# Altium PCB bdcmc25.PcbDoc (part 2 of 4)
Units mil, origin at the board's own origin, x right, y up, seen from the top; angles counter-clockwise.
Board outline 7750 x 2750 mil, 4 copper layers (Layer 1, Layer 2 (GND), Layer 3 (GND), Layer 4), stack 23.756 mil thick; 330 components, 156 nets, 997 pads, 1122 vias.
Unrouted connection lines stored in the file: 39.
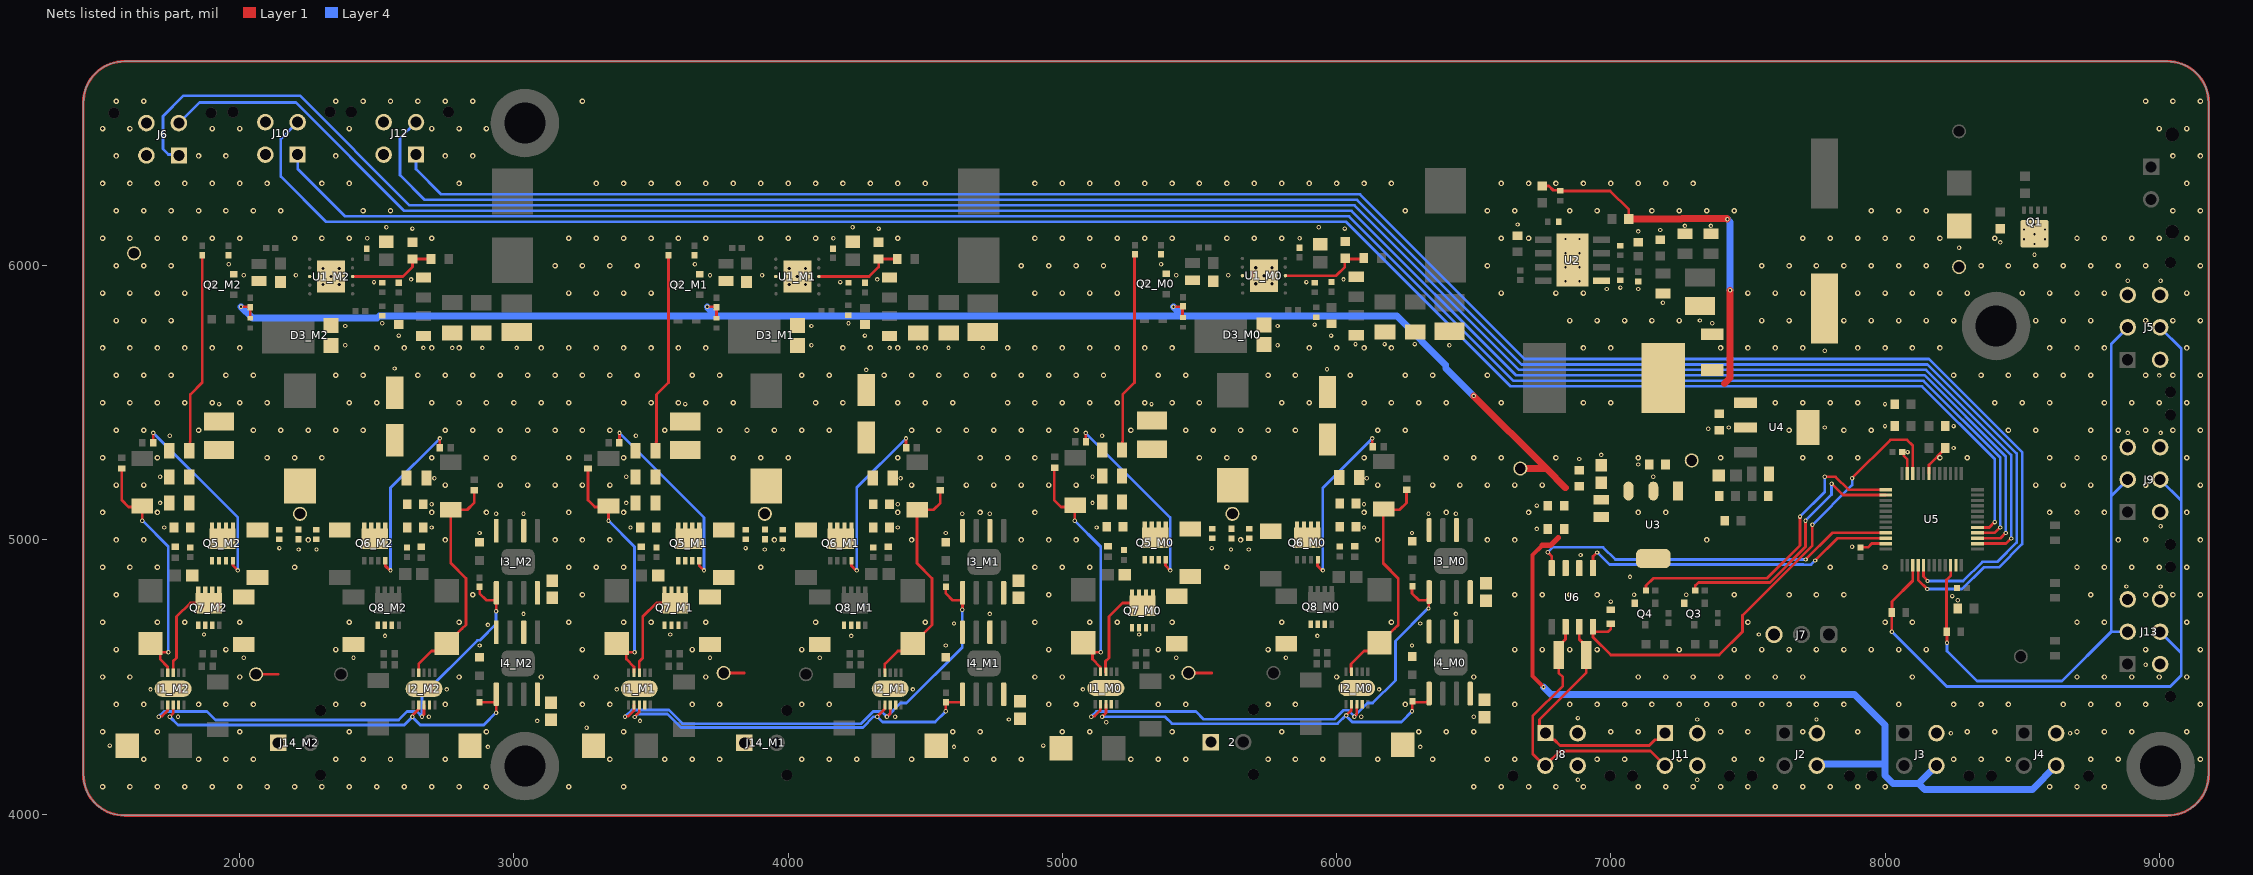
[diagram p4: the nets of this part, all layers, seen from the top]

## Part data
2 J14_M1 J14_M2: library part CONN-2POS-0001, "Connector Header Through Hole 2 position", Mfr_Name="Molex Connector Corporation", RefDes=RefDes, Type=Type
3V3 5V 8V GND GND TP3_M0 TP3_M1 TP3_M2 TP8_M0 TP8_M1 TP8_M2 TP9_M0 TP9_M1 TP9_M2 VBAT: "Oranange PC Test Point, Miniature Phoisphor Bronze Silver Plating Through Hole Mounting Type"
C1: library part CAP-100U-0001, "100uF 100V dc ALUM Electrolytic Capacitor J16,TK(A)Series 2000h 16(Dia.)x16.5mm", Capacitance=100uF, Package="RADIAL-2 Panasonic", Voltage=100V, Check_prices=https://www.snapeda.com/parts/EEETK2A101AM/Panasonic/view-part/?ref=eda, MF=Panasonic, MP=EEETK2A101AM, SnapEDA_Link=https://www.snapeda.com/parts/EEETK2A101AM/Panasonic/view-part/?ref=snap
C2 C9_M0 C9_M1 C9_M2 C16_M0 C16_M1 C16_M2: library part CAP-10U-0002, "CAP CER 10UF 50V X7R 1210", Capacitance=10uF, Case Code (Imperial)=1210, Case Code (Metric)=3225, Dielectric=X7R, Max Operating Temperature=125°C, Min Operating Temperature=-55°C, Package Quantity=1, Tolerance=10%, Voltage=50V, Case/Package=1210, Depth=2.5mm, Height=2.5mm, Lead Free="Lead Free", Length=3.2mm, Material=Ceramic, Mount="Surface Mount", Packaging="Tape and Reel", Radiation Hardening=No, Thickness=0.106inch, Voltage Rating=50V, Voltage Rating (DC)=50V, Width=0.098inch
C3 C10_M0 C10_M1 C10_M2 C17_M0 C17_M1 C17_M2 C56_M0 C56_M1 C56_M2 C57_M0 C57_M1 C57_M2: library part CAP-1U-0001, "CAP CER 1UF 50V X7R 0805", Capacitance="1 uF", Manufacturer=Yageo, Package=CC0805-0.85, Temperature="-30°C to +85°C", Temperature Characteristic=X7R, Temperature Range High=+85°C, Temperature Range Low=-30°C, Tolerance=0.1, Voltage Rating="50 V", Automotive=No, Category=Cap, ComponentLink2Description=Datasheet, ComponentLink2URL=http://www.yageo.com/documents/recent/UPY-GPHC_Y5V_6.3V-to-50V_8.pdf, Device Class L1="Passive Components", Device Class L2=Capacitors, Device Class L3="Ceramic Capacitors", Digikey Description="CAP CER 1UF 50V X7R 0805", Footprint Url=http://www.yageo.com/exep/pages/download/literatures/UPY-C_GEN_24.pdf, Height=0.95mm, Ipc Land Pattern Name=CAPC200125X85, Lead Free=Yes, Manufacturer Part Number=CC0805KKX7R9BB105, Material=Ceramic, Mouser Description="Multilayer Ceramic Capacitors MLCC - SMD/SMT 1.0uF 50V X7R 10%", Octopart=https://octopart.com/cc0805kkx7r9bb105-yageo-21707071, RoHS=TRUE
C4 C11_M0 C11_M1 C11_M2 C18_M0 C18_M1 C18_M2: library part CAP-0.1U-0002, "CAP CER 0.1UF 50V X7R 0805", Capacitance="100 nF", Manufacturer=Yageo, Package=CC0805-0.85, Temperature="-30°C to +85°C", Temperature Characteristic=X7R, Temperature Range High=+85°C, Temperature Range Low=-30°C, Tolerance=0.1, Voltage Rating="50 V", Automotive=No, Category=Cap, ComponentLink2Description=Datasheet, ComponentLink2URL=http://www.yageo.com/documents/recent/UPY-GPHC_Y5V_6.3V-to-50V_8.pdf, Device Class L1="Passive Components", Device Class L2=Capacitors, Device Class L3="Ceramic Capacitors", Digikey Description="CAP CER 0.1UF 50V X7R 0805", Footprint Url=http://www.yageo.com/exep/pages/download/literatures/UPY-C_GEN_24.pdf, Height=0.95mm, Ipc Land Pattern Name=CAPC200125X85, Lead Free=Yes, Manufacturer Part Number=CC0805KRX7R9BB104, Material=Ceramic, Mouser Description="Multilayer Ceramic Capacitors MLCC - SMD/SMT 100nF 50V X7R 10%", Octopart=https://octopart.com/cc0805krx7r9bb104-yageo-192993, RoHS=TRUE
C5 C12_M0 C12_M1 C12_M2 C19_M0 C19_M1 C19_M2 C52 C54 C58_M0 C58_M1 C58_M2 C59_M0 C59_M1 C59_M2: library part CAP-10N-0002, "CAP CER 10000PF 50V X7R 0603", Capacitance="10 nF", Manufacturer=YAGEO, Package=CC0603-DA, Temperature="-55°C to +125°C", Temperature Characteristic=X7R, Temperature Coefficient=15%, Temperature Range High=+125°C, Temperature Range Low=-55°C, Tolerance=0.1, Voltage="50 V", Automotive=No, Category=Cap, ComponentLink2Description=Datasheet, ComponentLink2URL=http://www.yageo.com/documents/recent/UPY-GPHC_X7R_6.3V-to-50V_18.pdf, Device Class L1="Passive Components", Device Class L2=Capacitors, Device Class L3="Ceramic Capacitors", Digikey Description="CAP CER 10000PF 50V X7R 0603", Footprint Url=http://www.yageo.com/exep/pages/download/literatures/UPY-C_GEN_24.pdf, Height=0.9mm, Lead Free=Yes, Manufacturer Part Number=CC0603KPX7R9BB103, Material=Ceramic, Mouser Description="0603 10 nF 50V ±10 % Tolerance X7R SMT Multilayer Ceramic Capacitor", Octopart=https://octopart.com/cc0603kpx7r9bb103-yageo-12885112, RoHS=TRUE, Voltage Rating="50 V"
C6 C13_M0 C13_M1 C13_M2 C20_M0 C20_M1 C20_M2 C62_M0 C62_M1 C62_M2 C63_M0 C63_M1 C63_M2: library part CAP-1N-0001, "CAP CER 1000PF 50V X7R 0402", Capacitance="1.0 nF", Manufacturer=YAGEO, Package=CC0402, Temperature="-55°C to +125°C", Temperature Characteristic=X7R, Temperature Coefficient=30ppm/°C, Temperature Range High=+125°C, Temperature Range Low=-55°C, Tolerance=0.1, Voltage Rating="50 V", Automotive=No, Automotive Grade=NA, Category=Cap, ComponentLink2Description=Datasheet, ComponentLink2URL=http://www.yageo.com/documents/recent/UPY-GP_NP0_16V-to-50V_16.pdf, Device Class L1="Passive Components", Device Class L2=Capacitors, Device Class L3="Ceramic Capacitors", Digikey Description="CAP CER 1000PF 50V X7R 0402", Footprint Url=http://www.yageo.com/exep/pages/download/literatures/UPY-C_GEN_24.pdf, Height=0.55mm, Ipc Land Pattern Name=CAPC10050X50, Lead Free=Yes, Manufacturer Part Number=CC0402KRX7R9BB102, Material=Ceramic, Mouser Description="0402 1000 pF 50 V ±10 % Tolerance X7R SMT Multilayer Ceramic Capacitor", Octopart=https://octopart.com/cc0402krx7r9bb102-yageo-192889, RoHS=TRUE
C7 C14_M0 C14_M1 C14_M2 C21_M0 C21_M1 C21_M2: library part CAP-100P-0001, "100 pF ±5% 50V Ceramic Capacitor C0G, NP0 0402 (1005 Metric)", Capacitance="100 pF", Package=None, Voltage=50V, Availability=Unavailable, MP=CC0402JRNPO9BN101, Price=None
C8 C15_M0 C15_M1 C15_M2 C22_M0 C22_M1 C22_M2: library part CAP-10P-0001, "Chip Capacitor, 10 pF, +/- 5%, 50 V, -55 to 125 degC, 0402 (1005 Metric), RoHS, Tape and Reel", Capacitance="10 pF", Case Code (Imperial)=0402, Case Code (Metric)=1005, Dielectric=C0G, Dielectric Material=Ceramic, Insulation Resistance=100GR, Manufacturer=Yageo, Max Operating Temperature=125degC, Min Operating Temperature=-55degC, Package Description="2-Pin Surface Mount Device, Body 1 x 0.5 mm", Package Quantity=1, Temperature Coefficient=30ppm/degC, Tolerance=5%, Voltage=50V, Case/Package=0402, Composition=Ceramic, Datasheet URL=http://www.yageo.com/documents/recent/UPY-GP_NP0_16V-to-50V_14.pdf, Datasheet Version="Rev. 14, 07/2016", Depth=0.5mm, Height=0.5mm, Lead Free=LeadFree, Length=1mm, Manufacturer URL=http://www.yageo.com/, Mount=SurfaceMount, Number of Pins=2, Package Reference=0402, Packaging=TapeandReel, Radiation Hardening=No, REACH SVHC=NoSVHC, RoHSCompliant=True, Termination=SMD/SMT, Thickness=0.022inch, Voltage Rating=50V, Voltage Rating (DC)=50V, Width=0.02inch
C23_M0 C23_M1 C23_M2 C30 C48 C49 C50: library part CAP-0.1U-0001, "CAP CER 0.1UF 16V X7R 0402", Capacitance="100 nF", Manufacturer=YAGEO, Package=CC0402, Temperature="-55°C to +125°C", Temperature Characteristic=X7R, Temperature Coefficient=30ppm/°C, Temperature Range High=+125°C, Temperature Range Low=-55°C, Tolerance=0.1, Voltage Rating="16 V", Automotive=No, Automotive Grade=NA, Category=Cap, ComponentLink2Description=Datasheet, ComponentLink2URL=http://www.yageo.com/documents/recent/UPY-GP_NP0_16V-to-50V_16.pdf, Device Class L1="Passive Components", Device Class L2=Capacitors, Device Class L3="Ceramic Capacitors", Digikey Description="CAP CER 0.1UF 16V X7R 0402", Footprint Url=http://www.yageo.com/exep/pages/download/literatures/UPY-C_GEN_24.pdf, Height=0.55mm, Ipc Land Pattern Name=CAPC10050X50, Lead Free=Yes, Manufacturer Part Number=CC0402KRX7R7BB104, Material=Ceramic, Mouser Description="0402 0.1 uF 16 V ±10 % Tolerance X7R SMT Multilayer Ceramic Capacitor", Octopart=https://octopart.com/cc0402krx7r7bb104-yageo-42244624, RoHS=TRUE
C24_M0 C24_M1 C24_M2 C25_M0 C25_M1 C25_M2: library part CAP-2.2U-0001, "CAP CER 2.2UF 100V X7R 1206", Capacitance=2.2uF, Case/Package=1206, Max Operating Temperature=125°C, Min Operating Temperature=-55°C, Tolerance=10%, Voltage=100V, Length=0.126inch, Mount="Surface Mount", Packaging="Tape and Reel", Thickness=0.057inch, Voltage Rating=100V, Width=0.063inch
C26_M0 C26_M1 C26_M2: library part CAP-47U-0001, "CAP ALUM POLY 47UF 20% 16V SMD", Capacitance=47uF, Case/Package=Radial, ESR (Equivalent Series Resistance)=25mR, Max Operating Temperature=105°C, Min Operating Temperature=-55°C, Package Quantity=2500, Ripple Current=3.2A, Tolerance=20%, Voltage=16V, Height - Seated (Max)=0.177inch, Life (Hours)=5000Hour, Mount="Surface Mount", Packaging="Cut Tape", Polarity=Polar, REACH SVHC="No SVHC", RoHS Compliant=Yes, Series="OS-CON™, SVPG", Voltage Rating=16V, Voltage Rating (DC)=16V
C27_M0 C27_M1 C27_M2: library part CAP-2.7N-0001, "Chip Multilayer Ceramic Capacitors for General Purpose, 0805, 2700pF, C0G, 30ppm/°C, 5%, 50V", Capacitance=2.7nF, Case Code (Imperial)=0805, Case Code (Metric)=2012, Dielectric=C0G, Max Operating Temperature=125°C, Min Operating Temperature=-55°C, Package Quantity=1, Temperature Coefficient=30ppm/°C, Tolerance=5%, Voltage=50V, Case/Package=0805, Depth=1.25mm, Height=0.6mm, Lead Free="Lead Free", Length=2mm, Mount="Surface Mount", Number of Pins=2, Packaging="Tape and Reel", Radiation Hardening=No, REACH SVHC="No SVHC", RoHS Compliant=Yes, Termination=SMD/SMT, Thickness=0.028inch, Voltage Rating=50V, Voltage Rating (DC)=50V, Width=0.049inch
C28_M0 C28_M1 C28_M2: library part CAP-6.8P-0001, "6.8pF ±0.25pF 100V Ceramic Capacitor C0G, NP0 0603 _1608 Metric", Capacitance=6.8pF, Package="0603 Yageo", Voltage=100V, Digi-Key_Part_Number=311-3850-1-ND, Digi-Key_Purchase_URL=https://www.digikey.com.tr/product-detail/en/yageo/CC0603CRNPO0BN6R8/311-3850-1-ND/8024939?utm_source=snapeda&utm_medium=aggregator&utm_campaign=symbol, MF=Yageo, MP=CC0603CRNPO0BN6R8, SnapEDA_Link=https://www.snapeda.com/parts/CC0603CRNPO0BN6R8/Yageo/view-part/1934420/?ref=snap
C29_M0 C29_M1 C29_M2: library part CAP-470P-0001, "CAP CER 470PF 50V C0G/NPO 0805", Capacitance=470pF, Mfr_Name=Yageo, Voltage=50V
C31 C39 C45 C47: library part CAP-10U-0001, "CAP CER 10UF 10V X5R 0603", Capacitance=10uF, Case Code (Imperial)=0603, Case Code (Metric)=1608, Dielectric=X5R, Max Operating Temperature=85°C, Min Operating Temperature=-55°C, Package Quantity=4000, Rated Voltage=10V, Resistor Type=Ceramic, Tolerance=10%, Case/Package=0603, Depth=0.8mm, Halogen Free="Halogen Free", Lead Free="Lead Free", Length=0.063inch, Mount="Surface Mount", Packaging="Tape and Reel", RoHS Compliant=Yes, Termination=SMD/SMT, Thickness=0.035inch, Voltage Rating=10V, Voltage Rating (DC)=10V, Weight=7.1E-05oz, Width=0.031inch
C32 C40 C41 C53 C55: library part CAP-1U-0002, "1 µF ±10% 16V Ceramic Capacitor X7R 0603 (1608 Metric)", Capacitance="1 µF", Voltage=16V
C33 C42: library part CAP-470P-0001, "CAP CER 470PF 50V C0G/NPO 0805", Capacitance="470 pF", Mfr_Name=Yageo, Voltage=50V
C34 C43 C60_M0 C60_M1 C60_M2 C61_M0 C61_M1 C61_M2 C64_M0 C64_M1 C64_M2 C65_M0 C65_M1 C65_M2: library part CAP-100N-0001, "0.1 µF ±10% 100V Ceramic Capacitor X7R 0603 (1608 Metric)", Capacitance="100 nF", Voltage="100 V"
C35: library part CAP-5.1P-0001, "5.1pF Â±0.25pF 50V Ceramic Capacitor C0G, NP0 0402 (1005 Metric)", Capacitance="5.1 pF", Package="0402 Yageo", Voltage Rating=50V, Availability=Good, Check_prices=https://www.snapeda.com/parts/CC0402CRNPO9BN5R1/Yageo/view-part/1841461/?ref=eda, MF=Yageo, MP=CC0402CRNPO9BN5R1, Price=None, Purchase-URL=https://pricing.snapeda.com/search/part/CC0402CRNPO9BN5R1/?ref=eda, SnapEDA_Link=https://www.snapeda.com/parts/CC0402CRNPO9BN5R1/Yageo/view-part/1841461/?ref=snap
C36: library part CAP-4.7U-0002, "CAP CER 4.7UF 50V X5R 0805", Capacitance="4.7 uF", Manufacturer=Yageo, Package=CC0805-0.85, Temperature="-30°C to +85°C", Temperature Characteristic=X5R, Temperature Range High=+85°C, Temperature Range Low=-30°C, Tolerance=0.1, Voltage Rating="50 V", Automotive=No, Category=Cap, ComponentLink2Description=Datasheet, ComponentLink2URL=http://www.yageo.com/documents/recent/UPY-GPHC_Y5V_6.3V-to-50V_8.pdf, Device Class L1="Passive Components", Device Class L2=Capacitors, Device Class L3="Ceramic Capacitors", Digikey Description="CAP CER 4.7UF 50V X5R 0805", Footprint Url=http://www.yageo.com/exep/pages/download/literatures/UPY-C_GEN_24.pdf, Height=0.95mm, Ipc Land Pattern Name=CAPC200125X85, Lead Free=Yes, Manufacturer Part Number=CC0805KKX5R9BB475, Material=Ceramic, Octopart=https://octopart.com/cc0805kkx5r9bb475-yageo-81932641, RoHS=TRUE
C37: library part CAP-0.22U-0001, "0.22 µF ±5% 50V Ceramic Capacitor X7R 0603 (1608 Metric)", Capacitance=0.22uF, Mfr_Name=Yageo, Voltage=50V
C38: library part CAP-22U-0001, "CAP CER 22UF 25V X5R 1210", Capacitance=22uF, Manufacturer="Murata Electronics North America", Operating Temperature="-55°C ~ 85°C", Package=GRM32, Package / Case="1210 (3225 Metric)", Standard Package=1,000, Temperature="-55°C to +85°C", Temperature Characteristic=X5R, Temperature Range High=+85°C, Temperature Range Low=-55°C, Tolerance=10%, Voltage - Rated=25V, Applications="General Purpose", Automotive=No, Category=Cap, ComponentLink2Description=Datasheet, ComponentLink2URL=https://search.murata.co.jp/Ceramy/image/img/A01X/G101/ENG/GRM32ER61E226KE15-01A.pdf, Device Class L1="Passive Components", Device Class L2=Capacitors, Device Class L3="Ceramic Capacitors", Digikey Description="CAP CER 22UF 25V X5R 1210", Height=2.7mm, Lead Free=Yes, Manufacturer Part Number=GRM32ER61E226KE15L, Material=Ceramic, Mounting Type="Surface Mount, MLCC", Mouser Description="Multilayer Ceramic Capacitors MLCC - SMD/SMT 1210 22uF 25volts X5R 10%", Octopart=https://octopart.com/grm32er61e226ke15l-murata-197441, Other Names=490-3889-2, Packaging="Cut Tape (CT)", Possible Substitute=GRM32ER61E226KE15K, RoHS=TRUE, Size / Dimension="0.126\" L x 0.098\" W (3.20mm x 2.50mm)", Temperature Coefficient=X5R, Thickness (Max)="0.106\" (2.70mm)", Voltage Rating=25V
C44 C46: library part CAP-0.33U-0001, "CAP CER 0.33UF 25V X7R 0603", Capacitance="330 nF", Manufacturer=YAGEO, Package=CC0603-DA, Rated Voltage=25V, Temperature="-55°C to +125°C", Temperature Characteristic=X7R, Temperature Coefficient=15%, Temperature Range High=+125°C, Temperature Range Low=-55°C, Tolerance=0.1, Voltage="25 V", Automotive=No, Category=Cap, ComponentLink2Description=Datasheet, ComponentLink2URL=http://www.yageo.com/documents/recent/UPY-GPHC_X7R_6.3V-to-50V_18.pdf, Device Class L1="Passive Components", Device Class L2=Capacitors, Device Class L3="Ceramic Capacitors", Digikey Description="CAP CER 0.33UF 25V X7R 0603", Footprint Url=http://www.yageo.com/exep/pages/download/literatures/UPY-C_GEN_24.pdf, Height=0.9mm, Lead Free=Yes, Manufacturer Part Number=CC0603KRX7R8BB334, Material=Ceramic, Mouser Description="0603 0.33 uF 25 V ±10 % Tolerance X7R SMT Multilayer Ceramic Capacitor", Octopart=https://octopart.com/cc0603krx7r8bb334-yageo-47255252, RoHS=TRUE, Voltage Rating="25 V"
C51: library part CAP-4.7U-0001, "25V 4.7uF X5R ±10% 0603 Multilayer Ceramic Capacitors MLCC - SMD/SMT ROHS", Capacitance="4.7 uF", JLC part number=C326580, Tolerance=10%, Voltage=25V, assembled=yes
D1: library part DIO-TVS-0001, "TVS DIODE 40VWM 64.5VC DO214AA", Clamping Voltage=64.5V, Current=9.3A, Mfr_Name="Bourns Electronics"
D2_M0 D2_M1 D2_M2 D4 D5 D18_M0 D18_M1 D18_M2 D19_M0 D19_M1 D19_M2: library part LED-0001, "LED YELLOW CLEAR 0603 SMD", Current Rating=30mA, Vf=2V
D3_M0 D3_M1 D3_M2: library part DIO-SHOTTKY-0001, "Schottky Barrier Rectifier, 60 V, 7 A, -65 to 150 degC, 3-Pin SMD, RoHS, Tape and Reel", Average Rectified Current=7A, Case\/Package=SMD/SMT, Forward Voltage=620mV, Manufacturer="Diodes Inc", Max Forward Surge Current (Ifsm)=275A, Max Operating Temperature=150degC, Max Repetitive Reverse Voltage (Vrrm)=60V, Min Operating Temperature=-65degC, Package Description="3-Pin Surface Mount Device, Body 3.975 x 5.375 mm, Pitch 1.84 mm", Package Quantity=5000, Package Reference=POWERDI5-3, Peak Reverse Current=200uA, Contact Plating=Matte, Current Rating=7A, Datasheet URL=https://www.diodes.com/assets/Datasheets/ds30477.pdf, Datasheet Version="Rev. 13-2, 10/2012", Element Configuration=CommonAnode, Forward Current=7A, Height=1.15mm, Lead Free=LeadFree, Length=4.05mm, Manufacturer URL=http://www.diodes.com/, Mount=SurfaceMount, Mounting Technology=SurfaceMount, Number of Pins=5, Output Current=7A, Packaging=TapeandReel, Peak Non-Repetitive Surge Current=275A, Polarity=Standard, Radiation Hardening=No, REACH SVHC=NoSVHC, Reverse Voltage (DC)=60V, RoHSCompliant=true, Voltage Rating (DC)=60V, Weight=0.003386oz, Width=5.45mm
D6_M0 D6_M1 D6_M2 D7_M0 D7_M1 D7_M2 D8_M0 D8_M1 D8_M2 D9_M0 D9_M1 D9_M2 D11_M0 D11_M1 D11_M2 D12_M0 D12_M1 D12_M2 D15_M0 D15_M1 D15_M2 D16_M0 D16_M1 D16_M2: library part DIO-0.53V-0001, "Diode Schottky 60 V 3A Surface Mount SOD-128/CFP5", Current Rating=3A, Manufacturer="Nexperia USA Inc.", Package=SOD-128/CFP5, Vf (Voltage Forward)="530 mV", assembled=no, Manufacturer Part Number=PMEG6030EP,115
D10_M0 D10_M1 D10_M2 D13_M0 D13_M1 D13_M2 D14_M0 D14_M1 D14_M2 D17_M0 D17_M1 D17_M2: library part DIO-19.9V-0001, "19.9V Clamp 30.2A Ipp Tvs Diode Surface Mount DO-214AA (SMBJ)", Breakdown Voltage=13.3, Current Rating=30.2A, Manufacturer="Littlefuse Inc.", Package="DO-214AA (SMBJ)", Standoff Voltage=12V, assembled=No, Manufacturer Part Number=SMBJ12CA
F1_M0 F1_M1 F1_M2: library part FUSE-0001, "FUSE BLOK CARTRIDGE 125V 10A SMD", Fuse Current=8A, Manufacturer="Littelfuse Inc", Package=0155, Voltage Rating Ac=125V, Automotive=No, Category=Fuse, ComponentLink2Description=Datasheet, ComponentLink2URL=https://www.littelfuse.com/~/media/electronics/datasheets/fuses/littelfuse_fuse_154_154t_154l_154tl_datasheet.pdf.pdf, Conn Orientation=Horizontal, Device Class L1="Circuit Protection", Device Class L2="Fuse Holders", Device Class L3=unset, Digikey Description="FUSE BLOK CARTRIDGE 125V 10A SMD", Height=3.81mm, Lead Free=Yes, Manufacturer Part Number=01550900M, Mouser Description="Fuse Holder ACS NANO HLDR", Number Of Fuses=1, Octopart=https://octopart.com/01550900m-littelfuse-9291575, RoHS=TRUE
F2 F3 F4: library part FUSE-0002, "1 A AC 32 V DC Fuse Board Mount (Cartridge Style Excluded) Surface Mount 0603 (1608 Metric)", Fuse Current=1A, Mfr_Name=Vishay, Voltage Rating DC=32V
I1_M0 I1_M1 I1_M2 I2_M0 I2_M1 I2_M2: library part IC-GTDR-0001, "Half-Bridge Gate Driver IC Non-Inverting 10-VSON (3x3)", Package=10-VSON, VCC Max=16
I3_M0 I3_M1 I3_M2 I4_M0 I4_M1 I4_M2: library part IC-MUX-0001, "Multiplexer 1 x 2:1 8-VSSOP"
J1: "Connector Header Through Hole 2 position 0.118\" (3.00mm)", Mfr_Name="Molex Connector Corporation", RefDes=RefDes, Type=Type
J2 J3 J4 J6 J8 J10 J11 J12: library part CONN-4POS-0002, Package=43045-0412, DeviceName=43045-0412, DeviceSetName=HEADER_POS4_?, GateName_1=G$1, LibraryName=con-molex-micro-fit-3_0_2, SymbolName_1=HEADER_POS4
J5 J9 J13: library part CONN-6POS-0001, Package=43045-0612, DeviceName=43045-0612, DeviceSetName=HEADER_POS6_?, GateName_1=G$1, LibraryName=con-molex-micro-fit-3_0_2, SymbolName_1=HEADER_POS6
J7: library part CONN-3POS-0001, "Connector Header Through Hole 3 position 0.100\" (2.54mm)", Color=Black, Contact Resistance=20mΩ, Current Rating=3A, Max Operating Temperature=105°C, Min Operating Temperature=-40°C, Operating Supply Voltage=250V, Connector Type="Male Pin", Contact Material=Copper, Contact Mating Length=5.9944mm, Contact Plating=Gold, Gender=Male, Height=8.94mm, Lead Free="Lead Free", Lead Pitch=2.54mm, Mount="Through Hole", NexarPartId=32855521, Number of Contacts=3, Number of Pins=3, Number of Positions=3, Number of Rows=1, Orientation=Vertical, Packaging=Bulk, Pitch=2.54mm, REACH SVHC=Unknown, RoHS=Compliant, Termination=Solder, Voltage Rating=250V
L1_M0 L1_M1 L1_M2: library part IND-10U-0001, "FIXED IND 10UH 6.5A 30 MOHM SMD", Current Rating=6.5A, Inductance=10uH
L2: library part IND-4.7U-0001, "FIXED IND 220UH 520MA 960MOHM SM", Current Rating=2.75A, Inductance=4.7uH
Q1: library part NMOS-60A-0001, "MOSFET N-CH 60V 12A/60A 8VSON", Continuous Drain Current=12A, Drain Current=60A, Drain To Source Breakdown Voltage=60V, Drain To Source Resistance=8.1mΩ, Gate To Source Voltage=20V, Input Capacitace At Vds="885pF @ 30V", Manufacturer="Texas Instruments", Max Forward Diode Voltage=1V, Max Junction Temp=+150°C, Package=DNH0008A, Power Dissipation=2.8W, Pulse Drain Current=156A, Temperature="-55°C to +150°C", Temperature Range Low=-55°C, Typ Forward Diode Voltage=0.8V, Automotive=No, Category=Trans, ComponentLink2Description=Datasheet, ComponentLink2URL=http://www.ti.com/lit/ds/symlink/csd18543q3a.pdf, Depletion Mode=False, Device Class L1="Discrete Semiconductors", Device Class L2=Transistors, Device Class L3=MOSFETs, Digikey Description="60V N-CHANNEL NEXFET POWER MOSF", Drain To Source Voltage=60V, Gate Charge At Vgs="11.1nC @ 10V", Height=0.9mm, Lead Free=Yes, Manufacturer Part Number=CSD18543Q3AT, Mouser Description="Transistor: N-MOSFET; unipolar; 60V; 35A; 66W; VSONP8 3, 3x3, 3mm", Number Of Channels=1, Number Of N Channels=1, Octopart=https://octopart.com/csd18543q3at-texas+instruments-77040189, Reverse Recovery Charge=37nC, Reverse Recovery Time=27ns, RoHS=TRUE, Rthja Max=55°C/W, Standoff Height=0mm, Temperature Range High=+150°C, Threshold Vgs Max=2.7V, Threshold Vgs Min=1.5V, Transconductance=40S, Turn Off Delay Time=8ns, Turn On Delay Time=9ns, Vgs="2.7V @ 250uA"
Q2_M0 Q2_M1 Q2_M2 Q3 Q4: library part NMOS-200MA-0001, "MOSFET N-CH 60V 200MA SOT23", Manufacturer=Toshiba, Package=SOT-23-3, Assembled?=no, FET type=N-Channel, Id-Continuous=200mA, Manufacturer Part Number=T2N7002AK,LM, Rds On-Max=3.9Ohm, VDS-Max=60V, Vgs-Max=20V
Q5_M0 Q5_M1 Q5_M2 Q6_M0 Q6_M1 Q6_M2 Q7_M0 Q7_M1 Q7_M2 Q8_M0 Q8_M1 Q8_M2: library part NMOS-26A-0001, "N-Channel 30 V 60A (Ta) 2.8W (Ta), 108W (Tc) Surface Mount 8-VSON-CLIP (3.3x3.3)", Current=60A, Voltage=30V
R1: library part RES-200k-0001, "RES SMD 200K OHM 1% 1/10W 0603", Case Code (Imperial)=0603, Case Code (Metric)=1608, Max Operating Temperature=155°C, Max Power Dissipation=100mW, Min Operating Temperature=-55°C, Package Quantity=1, Resistance="200k, 1%", Resistance Tolerance=1%, Resistor Type="Thick Film", Temperature Coefficient=100ppm/°C, Voltage Rating=50V, Case/Package=0603, Construction=Rectangular, Depth=0.8mm, Features="Moisture Resistant", Height=0.022inch, Lead Free="Lead Free", Length=1.6mm, Military Standard=Not, Number of Pins=2, Number of Terminations=2, Packaging="Tape and Reel", Power=100mW, Power Rating=100mW, REACH SVHC="No SVHC", RoHS Compliant=Yes, Series=RC, Size Code=0603, Termination=SMD/SMT, Tolerance=1%, Voltage Rating (DC)=50V, Width=0.031inch
R2 R6_M0 R6_M1 R6_M2 R11 R12: library part RES-100k-0001, "RES SMD 100K OHM 1% 1/10W 0603", Case Code (Imperial)=0603, Case Code (Metric)=1608, Max Operating Temperature=155°C, Max Power Dissipation=100mW, Min Operating Temperature=-55°C, Resistance="100k, 1%", Resistance Tolerance=1%, Resistor Type="Thick Film", Temperature Coefficient=100ppm/°C, Voltage Rating=50V, Working Voltage=75V, Case/Package=0603, Construction=Rectangular, Depth=0.8mm, Features="Moisture Resistant", Height=0.45mm, Lead Free="Lead Free", Length=1.6mm, Military Standard=Not, Number of Pins=2, Number of Terminations=2, Packaging="Tape and Reel", Power=100mW, Power Rating=100mW, REACH SVHC="No SVHC", RoHS Compliant=Yes, Series=RC, Technology="THICK FILM", Termination=SMD/SMT, Tolerance=1%, Voltage Rating (DC)=50V, Width=0.8mm
R3_M0 R3_M1 R3_M2: library part RES-240-0001, "240R 0.063W 1% 0402 (1005 Metric)  SMD", Case-EIA=0402, Case-Metric=1005, Power="1/16 W", Resistance=240R, Tolerance="1 %", Technology=SMT
R4_M0 R4_M1 R4_M2: library part RES-2.15M-0001, "RES SMD 2.15M OHM 1% 1/10W 0603", Package=None, Power=1/10W, Resistance=2.15M, Availability=Unavailable, MP=RC0603FR-072M15L, Price=None
R5_M0 R5_M1 R5_M2: library part RES-1k-0001, "RES 1K OHM 1% 1/16W 0402", Case Code (Imperial)=0402, Case Code (Metric)=1005, Max Operating Temperature=155°C, Max Power Dissipation=63mW, Min Operating Temperature=-55°C, Power=1/16W, Power Rating=62.5mW, Resistance="1k, 1%", Resistance Tolerance=1%, Resistor Type="Thick Film", Temperature Coefficient=100ppm/°C, Voltage Rating=50V, Case/Package=0402, Construction=Rectangular, Depth=0.5mm, Features="Moisture Resistant", Height=0.32mm, Lead Free="Lead Free", Length=1mm, Military Standard=Not, Number of Pins=2, Number of Terminations=2, Packaging="Tape and Reel", Reach SVHC Compliant=Yes, RoHS Compliant=Yes, Series=RC, Size Code=0402, Technology="THICK FILM", Termination=SMD/SMT, Tolerance=1%, Voltage Rating (DC)=50V, Width=0.5mm
R7_M0 R7_M1 R7_M2: library part RES-147k-0001, "RES 147K OHM 1% 1/16W 0402", Manufacturer="Yageo / Phycomp", Power=1/16W, Resistance="147k, 1%", Part Number=RC0402FR-07147KL
R8_M0 R8_M1 R8_M2: library part RES-60.4k-0001, "RES 60.4K OHM 1% 1/16W 0402", Manufacturer="Yageo / Phycomp", Power=1/16W, Resistance="60.4k, 1%", Part Number=RC0402FR-0760K4L
R9_M0 R9_M1 R9_M2: library part RES-158k-0001, "RES 158K OHM 1% 1/16W 0402", Manufacturer=Yageo, Power=1/16W, Resistance="158k, 1%", Part Number=RC0402FR-07158KL
R10_M0 R10_M1 R10_M2: library part RES-10.5k-0001, "RES 10.5K OHM 1% 1/16W 0402", Manufacturer="Yageo / Phycomp", Power=1/16W, Resistance="10.5k, 1%", Part Number=RC0402FR-0710K5L
R13: library part RES-15.4K-0001, "RES 15.4kΩ ±1% 0.063W 0402", Case Code (Imperial)=0402, Case Code (Metric)=1005, Max Operating Temperature=155°C, Max Power Dissipation=63mW, Min Operating Temperature=-55°C, Power Rating="1/16 W", Resistance=15.4k, Resistor Type="Thick Film", Temperature Coefficient=100ppm/°C, Tolerance=1%, Voltage Rating=50V, Case/Package=0402, Features="Moisture Resistant", Height=0.015inch, Length=0.039inch, Number of Terminations=2, Packaging="Tape and Reel", RoHS Compliant=Yes, Series=AC, Termination=SMD/SMT, Width=0.5mm
R14 R15: library part RES-4.7k-0001, "Chip Resistor, 4.7 KOhm, +/- 1%, 0.1 W, -55 to 155 degC, 0603 (1608 Metric), RoHS, Tape and Reel", Case Code - in=0603, Case Code - mm=1608, Manufacturer=Yageo, Operating Temperature Range=-55Cto+155C, Package Description="2-Pin Surface Mount Device, Body 1.6 x 0.8 mm", Power Rating=100mW, Resistance="4.7k, 1%", Temperature Coefficient=100PPM/C, Tolerance=1%, Voltage Rating=50V, Datasheet URL=http://www.yageo.com/documents/recent/PYu-RC_Group_51_RoHS_L_7.pdf, Datasheet Version="Rev. 7, 05/2017", Manufacturer URL=http://www.yageo.com/, Mounting Technology=SurfaceMount, Package Reference=0603, Packaging=Reel, Product=ThickFilmResistorsGeneralPurpose, Series=RC, Termination Style=SMD/SMT
R16 R17: library part RES-470-0001, "470 Ohms ±1% 0.063W, 1/16W Chip Resistor 0402 (1005 Metric) Moisture Resistant Thick Film", Manufacturer="Yageo / Phycomp", Power=1/16W, Resistance="470R, 1%", Part Number=RC0402FR-07470RL
R18 R19 R32_M0 R32_M1 R32_M2 R33_M0 R33_M1 R33_M2: library part RES-100-0001, "RES 100 OHM 1% 1/16W 0402", Case Code (Imperial)=0402, Case Code (Metric)=1005, Max Operating Temperature=155°C, Max Power Dissipation=63mW, Min Operating Temperature=-55°C, Power=1/16W, Power Rating=62.5mW, Resistance="100, 1%", Resistance Tolerance=1%, Resistor Type="Thick Film", Temperature Coefficient=100ppm/°C, Voltage Rating=50V, Case/Package=0402, Construction=Rectangular, Depth=0.5mm, Features="Moisture Resistant", Height=0.32mm, Lead Free="Lead Free", Length=1mm, Military Standard=Not, Number of Pins=2, Number of Terminations=2, Packaging="Tape and Reel", Reach SVHC Compliant=Yes, RoHS Compliant=Yes, Series=RC, Size Code=0402, Technology="THICK FILM", Termination=SMD/SMT, Tolerance=1%, Voltage Rating (DC)=50V, Width=0.5mm
R20: library part RES-4.7k-0001, "Chip Resistor, 4.7 KOhm, +/- 1%, 0.1 W, -55 to 155 degC, 0603 (1608 Metric), RoHS, Tape and Reel", Case Code - in=0603, Case Code - mm=1608, Manufacturer=Yageo, Operating Temperature Range=-55Cto+155C, Package Description="2-Pin Surface Mount Device, Body 1.6 x 0.8 mm", Power Rating="1/10 W", Resistance="4.7k, 1%", Temperature Coefficient=100PPM/C, Tolerance=1%, Voltage Rating=50V, Datasheet URL=http://www.yageo.com/documents/recent/PYu-RC_Group_51_RoHS_L_7.pdf, Datasheet Version="Rev. 7, 05/2017", Manufacturer URL=http://www.yageo.com/, Mounting Technology=SurfaceMount, Package Reference=0603, Packaging=Reel, Product=ThickFilmResistorsGeneralPurpose, Series=RC, Termination Style=SMD/SMT
R21: library part RES-120-0001, "120 Ohms ±1% 0.5W, 1/2W Chip Resistor 1210 (3225 Metric) Moisture Resistant Thick Film", Manufacturer=Yageo, Power=1/2W, Resistance="120R, 1%", Part Number=RC1210FR-07120RL
R22_M0 R22_M1 R22_M2 R23_M0 R23_M1 R23_M2 R24_M0 R24_M1 R24_M2 R25_M0 R25_M1 R25_M2 R28_M0 R28_M1 R28_M2 R29_M0 R29_M1 R29_M2 R30_M0 R30_M1 R30_M2 R31_M0 R31_M1 R31_M2: library part RES-33-0001, "33 Ohms ±1% 0.125W, 1/8W Chip Resistor 0402 (1005 Metric) Moisture Resistant Thick Film", Power="1/8 W", Resistance="33 Ω"
R26_M0 R26_M1 R26_M2 R27_M0 R27_M1 R27_M2: library part RES-1-0001, "100mW Thick Film Resistors ±5% -100ppm/℃~+600ppm/℃ -55℃~+155℃ 1Ω 0402 Chip Resistor - Surface Mount ROHS", JLC part number=C412890, Power="0.1 W", Resistance="1 Ω", Tolerance=5%, Assembled?=yes
U1_M0 U1_M1 U1_M2: library part IC-BUCK-0001, "IC REG BCK SPLIT RAIL ADJ 10WSON", Max Input Voltage=60V, Max Operating Temperature=125°C, Max Output Current=5A, Max Output Voltage=59V, Min Input Voltage=4.5V, Min Operating Temperature=-40°C, Min Output Voltage=800mV, Package Quantity=3000, Quiescent Current=152uA, Switching Frequency=2.5MHz, Lead Free="Lead Free", Mount="Surface Mount", Number of Outputs=1, Number of Pins=10, Operating Supply Voltage=60V, Output Configuration=Positive, Output Current=5A, Output Type=Adjustable, Output Voltage=59V, Packaging="Tape and Reel", Radiation Hardening=No, RoHS Compliant=Yes, Synchronous Rectifier=No
U2: library part IC-BUCK-0003, "Buck Switching Regulator IC Positive Adjustable 1V 1 Output 1A 8-PowerSOIC (0.154\", 3.90mm Width)", Mfr_Name="Texas Instruments", RefDes=RefDes, Type=TYPE
U3: library part IC-LDO-0001, "IC REG LINEAR 5V 500MA SOT223-4", Dropout Voltage=2V, Manufacturer="Texas Instruments", Max Junction Temp=+125°C, Max Supply Voltage=25V, Min Supply Voltage=7V, Output Current=500mA, Output Voltage=5V, Package=DCY0004A, Temperature="-40°C to +125°C", Temperature Range Low=-40°C, Automotive=No, Category=IC, ComponentLink2Description=Datasheet, ComponentLink2URL=http://www.ti.com/lit/ds/symlink/ua78m.pdf, Device Class L1="Integrated Circuits (ICs)", Device Class L2="Power Management ICs", Device Class L3="Voltage Regulators - Linear", Digikey Description="IC REG LINEAR 5V 500MA SOT223-4", Height=1.8mm, Ipc Land Pattern Name=SOT230P700X180-4, Lead Free=Yes, Manufacturer Part Number=UA78M05IDCYR, Mouser Description="Linear Voltage Regulators 5V 500mA Fixed Pos Voltage Regulator", Number of Outputs=1, Octopart=https://octopart.com/ua78m05idcyr-texas+instruments-525575, Output Type=Fixed, RoHS=TRUE, Standoff Height=0.02mm, Temperature Range High=+125°C
U4: library part IC-LDO-0002, "IC REG LIN 3.3V 500MA SOT223-4", Package="SOT-223-4 Texas Instruments", Availability="In Stock", Check_prices=https://www.snapeda.com/parts/UA78M33CDCYR/Texas+Instruments/view-part/?ref=eda, MF="Texas Instruments", MP=UA78M33CDCYR, Price=None, Purchase-URL=https://pricing.snapeda.com/search/part/UA78M33CDCYR/?ref=eda, SnapEDA_Link=https://www.snapeda.com/parts/UA78M33CDCYR/Texas+Instruments/view-part/?ref=snap
U5: library part IC-STM32G431CBT6, "ARM® Cortex®-M4F STM32G4 Microcontroller IC 32-Bit Single-Core 170MHz 128KB (128K x 8) FLASH 48-LQFP (7x7)"
U6: library part IC-CAN-0003, "1/1 Transceiver CANbus 8-SOIC", Mfr_Name="Texas Instruments", RefDes=RefDes, Type=TYPE

## Free pads (board coordinates)
  round 250 hole 150: ""(3040,4175) ""(3040,6520) ""(8405,5780) ""(9005,4175)

## Via types
v1: diameter 20, hole 10, Layer 1 to Layer 4, 760 vias
v2: diameter 16, hole 8, Layer 1 to Layer 4, 340 vias
v3: diameter 23.62, hole 11.81, Layer 1 to Layer 4, 15 vias
v4: diameter 19.68, hole 7.87, Layer 1 to Layer 4, 7 vias

## Nets (pads, with @x,y where several pads share a name; then routed paths per layer and width w, separated by ;. In a path a pad name is that pad's centre, name@x,y a point inside that pad or via, vN(x,y) a via of type N, cw(c..) or ccw(c..) an arc to the next point about the centre after c; other vN are vias at no path point)
3V3: C64_M0.1 C64_M1.1 C64_M2.1 C65_M0.1 C65_M1.1 C65_M2.1 I3_M0.8 I3_M1.8 I3_M2.8 I4_M0.8 I4_M1.8 I4_M2.8
5V: 5V.1 C39.1 C40.1 C42.2 C43.2 C45.1 J2.P$4 J3.P$4 J4.P$4 R3_M0.1 R3_M1.1 R3_M2.1 R5_M0.1 R5_M1.1 R5_M2.1 U3.3 U6.3 | length 8641.9
  Layer 1 w10: v2(2005,5850) 2037.23,5850 R5_M2.1@2038.49,5848.74 R3_M2.1@2038.49,5808.19 ; v2(3705,5850) 3737.23,5850 3738.49,5848.74 R3_M1.1@3738.49,5808.19 ; v2(5405,5850) 5437.23,5850 5438.49,5848.74 R3_M0.1@5438.49,5808.19 ; 6835,5185 6835,5190
  Layer 1 w15: 6750,4980 6715,4945 6715,4502.99 v2(6754.65,4463.34)
  Layer 1 w20: 6750,4980 6780,4980 6807.5,5007.5
  Layer 1 w25: v2(6500,5525) 6765,5260 ; 5V.1@6685,5260 6765,5260 ; 6835,5190 6765,5260 ; J2.P$4@7751.56,4176.89 J2.P$4@7756.97,4182.3
  Layer 4 w25: v2(2005,5850) 2046.16,5808.84 2501.59,5808.84 2509.09,5816.34 3735,5816.34 ; v2(3705,5850) 3735,5820 3735,5816.34 ; v2(5405,5850) 5430,5825 5430,5816.34 ; v2(6500,5525) 6397.96,5627.04 6397.96,5638.21 6219.82,5816.34 5430,5816.34 ; v2(6754.65,4463.34) 6781.65,4436.34 7888.66,4436.34 8000,4325 8000,4182.3 ; J2.P$4@7756.97,4182.3 8000,4182.3 ; J3.P$4@8187.81,4176.89 8122.85,4111.93 ; J4.P$4@8624.06,4176.89 8537.17,4090 8144.77,4090 8122.85,4111.93 ; 3735,5816.34 5430,5816.34 ; 8000,4182.3 8000,4140.85 8028.92,4111.93 8122.85,4111.93
8V_TO_LDO: 8V.1 C35.1 C38.1 C44.1 C46.1 L2.2 R11.1 R12.2 U3.1 U4.1 | length 1358.1
  Layer 1 w10: R11.1@6750,6290.58 6774.42,6290.58 6790,6275 6812.52,6275 C35.1@6815,6272.52 6997.48,6272.52 7065.58,6204.42 R12.2@7065.58,6170
  Layer 1 w25: R12.2@7065.58,6170 7257.75,6170 7259.09,6171.34 7423.18,6171.34 v2@7424.52,6170 ; 7413.91,5570 7435,5591.09 v2(7435,5910)
  Layer 4 w25: v2(7425,6169.52) 7435,6159.52 v2(7435,5910)
12V_MOTOR_M0: C16_M0.1 C17_M0.2 C18_M0.2 C19_M0.2 C20_M0.2 C21_M0.2 C22_M0.2 C26_M0.2 C56_M0.2 C57_M0.2 C58_M0.2 C59_M0.2 C62_M0.1 C63_M0.1 D8_M0.2 D9_M0.2 L1_M0.2 Q5_M0.3 Q6_M0.3 R7_M0.1 R26_M0.1 R27_M0.1 TP3_M0.1 | length 705.9
  Layer 1 w10: C56_M0.2@5216.42,5325 C56_M0.2@5220,5328.58 ; 5218.42,5356.56 5220,5358.14 5220,5530 5263.49,5573.49 R7_M0.1@5263.49,6038.74
12V_MOTOR_M1: C16_M1.1 C17_M1.2 C18_M1.2 C19_M1.2 C20_M1.2 C21_M1.2 C22_M1.2 C26_M1.2 C56_M1.2 C57_M1.2 C58_M1.2 C59_M1.2 C62_M1.1 C63_M1.1 D8_M1.2 D9_M1.2 L1_M1.2 Q5_M1.3 Q6_M1.3 R7_M1.1 R26_M1.1 R27_M1.1 TP3_M1.1 | length 705.9
  Layer 1 w10: C56_M1.2@3516.42,5325 C56_M1.2@3520,5328.58 ; 3518.42,5356.56 3520,5358.14 3520,5530 3563.49,5573.49 R7_M1.1@3563.49,6038.74
12V_MOTOR_M2: C16_M2.1 C17_M2.2 C18_M2.2 C19_M2.2 C20_M2.2 C21_M2.2 C22_M2.2 C26_M2.2 C56_M2.2 C57_M2.2 C58_M2.2 C59_M2.2 C62_M2.1 C63_M2.1 D8_M2.2 D9_M2.2 L1_M2.2 Q5_M2.3 Q6_M2.3 R7_M2.1 R26_M2.1 R27_M2.1 TP3_M2.1 | length 705.9
  Layer 1 w10: C56_M2.2@1816.42,5325 C56_M2.2@1820,5328.58 ; 1818.42,5356.56 1820,5358.14 1820,5530 1863.49,5573.49 R7_M2.1@1863.49,6038.74
CAN_RX_LED: R17.2 U5.25 | length 1170.1
  Layer 1 w10: R17.2@7128.27,4815 7128.27,4833.27 7155,4860 7570,4860 7690,4980 v2(7690,5085) ; v2(7780,5230) 7820,5230 7866.73,5183.27 U5.25@8002.68,5183.27
  Layer 4 w10: v2(7690,5085) 7780,5175 v2(7780,5230)
CAN_STB: R20.1 U5.22 U6.8 | length 1844.7
  Layer 1 w10: R20.1@7000,4694.41 7000,4675 6990,4665 6944.81,4665 6935,4674.81 6935,4645 7000,4580 7395,4580 7480,4665 7480,4725 7735,4980 v2(7735,5055) ; v2(7880,5225) 8020,5365 8080,5365 8101.1,5343.9 U5.22@8101.1,5242.32
  Layer 4 w10: v2(7735,5055) 7880,5200 v2(7880,5225)
CAN_TX_LED: R16.2 U5.26 | length 962.9
  Layer 1 w10: R16.2@7308.27,4815 7308.27,4833.27 7320,4845 7580,4845 7710,4975 v2(7710,5070) ; v2(7805,5205) 7846.42,5163.58 U5.26@8002.68,5163.58
  Layer 4 w10: v2(7710,5070) 7805,5165 v2(7805,5205)
CANH: J8.P$1 J11.P$1 R21.1 U6.7 | length 950.9
  Layer 1 w10: U6.7@6885,4682.72 6885,4637.68 6910.2,4612.48 R21.1@6910.2,4580 6910.2,4515.2 6740,4345 6740,4315.94 6784.7,4271.24 6793.76,4271.24 6815,4250 7140,4250 7161.32,4271.32 7173.51,4271.32 J11.P$1@7197.19,4295
CANL: J8.P$3 J11.P$3 R21.2 U6.6 | length 1069.1
  Layer 1 w10: U6.6@6835,4682.72 6835,4637.68 6809.8,4612.48 R21.2@6809.8,4580 6809.8,4515.2 6825,4500 6825,4467.42 6715,4357.42 6715,4220 6758.11,4176.89 J8.P$3@6760.94,4176.89 6814.05,4230 7144.08,4230 J11.P$3@7197.19,4176.89
DIR_1_IN_M0: I1_M0.7 I2_M0.8 I3_M0.5 R32_M0.1 | length 1783.6
  Layer 1 w10: v2(5105,4355) 5107.3,4357.3 5117.3,4357.3 5137.79,4377.79 I1_M0.7@5137.79,4398 ; v2(6065,4355) 6065,4356.62 6073.98,4365.6 6073.98,4397.09 I2_M0.8@6073.07,4398 ; R32_M0.1@6275,4828.27 6275,4805 6300,4780 6328.25,4780 6335.87,4787.62 6335.87,4797.22 6336.15,4796.93 6336.15,4751.15 v2(6335,4750)
  Layer 4 w10: v2(5105,4355) 5123.84,4373.84 5486.8,4373.84 5514.65,4345.98 5992.63,4345.98 6025.49,4378.84 6042.8,4378.84 v2@6063.85,4357.8 ; v2(6065,4355) 6065,4356.62 6071.16,4362.78 6113.35,4405 6131.65,4405 6214.42,4487.77 6214.42,4631.07 6332.2,4748.85 6333.85,4748.85 v2(6335,4750)
DIR_1_IN_M1: I1_M1.7 I2_M1.8 I3_M1.5 R32_M1.1 | length 1798.6
  Layer 1 w10: v2(3405,4355) 3407.3,4357.3 3417.3,4357.3 3437.79,4377.79 I1_M1.7@3437.79,4398 ; v2(4360,4355) 4360.22,4355 4372.47,4367.25 I2_M1.8@4372.47,4398 ; R32_M1.1@4575,4828.27 4575,4805 4600,4780 4628.25,4780 I3_M1.5@4635.49,4787.25 ; v2(4635,4745) 4635.49,4745.49 I3_M1.5@4635.49,4787.25 ; I3_M1.5@4635.87,4806.81 4635.87,4797.22 4635.49,4796.84 I3_M1.5@4635.49,4787.25
  Layer 4 w10: v2(3405,4355) 3430,4380 3565,4380 3615,4330 4266.65,4330 4310.49,4373.84 4341.16,4373.84 v2(4360,4355) 4410,4405 4431.65,4405 4635,4608.35 v2(4635,4745)
DIR_1_IN_M2: I1_M2.7 I2_M2.8 I3_M2.5 R32_M2.1 | length 1775.4
  Layer 1 w10: v2(1705,4355) 1707.3,4357.3 1717.3,4357.3 1737.79,4377.79 I1_M2.7@1737.79,4398 ; v2(2665,4355) 2665,4356.62 2672.47,4364.09 I2_M2.8@2672.47,4398 ; R32_M2.1@2875,4828.27 2875,4805 2900,4780 2928.25,4780 I3_M2.5@2935.43,4787.19 ; v2(2935,4740) 2935.43,4740.43 I3_M2.5@2935.43,4787.19 ; I3_M2.5@2935.87,4806.81 2935.43,4806.38 I3_M2.5@2935.43,4787.19
  Layer 4 w10: v2(1705,4355) 1723.84,4373.84 1881.16,4373.84 1911.81,4343.19 2579.84,4343.19 2610.49,4373.84 2646.16,4373.84 v2(2665,4355) 2665,4431.65 2867.2,4633.84 2875.49,4633.84 2935,4693.35 v2(2935,4740)
DIR_2_IN_M0: I1_M0.8 I2_M0.7 I4_M0.5 R33_M0.1 | length 1397.8
  Layer 1 w10: v2(5145,4355) 5158.98,4368.98 I1_M0.8@5158.98,4400.8 ; v2(6035,4360) 6053.39,4378.39 I2_M0.7@6053.39,4398 ; v2(6275,4375) 6275.75,4375.75 R33_M0.1@6275.75,4408.27 ; R33_M0.1@6276.51,4411.06 6275.75,4410.31 R33_M0.1@6275.75,4408.27 ; I4_M0.5@6335.87,4436.81 6335.87,4415.89 6328.25,4408.27 R33_M0.1@6275.75,4408.27
  Layer 4 w10: v2(5145,4355) 5375,4355 5400,4330 6003.38,4330 6033.38,4360 v2(6035,4360) 6035,4358.38 6046.16,4347.22 6057.2,4336.16 6236.16,4336.16 v2(6275,4375)
DIR_2_IN_M1: I1_M1.8 I2_M1.7 I4_M1.5 R33_M1.1 | length 1413.6
  Layer 1 w10: 3446.16,4361.16 3457.47,4372.47 I1_M1.8@3457.47,4398 ; v2(4325,4355) 4325,4355.4 4352,4382.4 4352,4397.21 I2_M1.7@4352.79,4398 ; v2(4575,4375) 4575.06,4375.06 4575.06,4408.21 R33_M1.1@4575.12,4408.27 4628.25,4408.27 4635.87,4415.89 I4_M1.5@4635.87,4436.81
  Layer 4 w10: v2(3440.82,4354.18) 3451.65,4365 3560.2,4365 3609.2,4316 4272.45,4316 4311.96,4355.51 4324.49,4355.51 4343.84,4336.16 4536.16,4336.16 v2(4575,4375)
DIR_2_IN_M2: I1_M2.8 I2_M2.7 I4_M2.5 R33_M2.1 | length 1478.1
  Layer 1 w10: v2(1745,4355) 1757.47,4367.47 I1_M2.8@1757.47,4398 ; v2(2630,4355) 2631.15,4356.15 2631.15,4361.67 2651.88,4382.4 2651.88,4397.09 I2_M2.7@2652.79,4398 ; R33_M2.1@2875,4408.27 2928.25,4408.27 I4_M2.5@2935.43,4415.46 ; v2(2935,4370) 2935.43,4370.43 I4_M2.5@2935.43,4415.46 ; I4_M2.5@2935.87,4436.81 2935.43,4436.38 I4_M2.5@2935.43,4415.46
  Layer 4 w10: v2(1745,4355) 1775,4325 2600,4325 v2(2630,4355) 2630,4353.38 2658.38,4325 2890,4325 v2(2935,4370)
EN_M0: R4_M0.2 R6_M0.1 U1_M0.3 | length 327.1
  Layer 1 w10: U1_M0.3@5813.46,5963.27 5998.27,5963.27 6030,5995 6030,6024.42 6097.14,6024.42 R4_M0.2@6097.72,6025
EN_M1: R4_M1.2 R6_M1.1 U1_M1.3 | length 329.7
  Layer 1 w10: U1_M1.3@4111.95,5960.47 4295.47,5960.47 4330,5995 4330,6024.42 4397.14,6024.42 R4_M1.2@4397.72,6025
EN_M2: R4_M2.2 R6_M2.1 U1_M2.3 | length 329.7
  Layer 1 w10: U1_M2.3@2411.95,5960.47 2595.47,5960.47 2630,5995 R6_M2.1@2630,6024.42 2697.14,6024.42 R4_M2.2@2697.72,6025
FDCAN_RX: U5.33 U6.4 | length 1362.6
  Layer 1 w10: v2(6770,4955) 6785,4940 U6.4@6785,4897.28 ; v2(7710.24,4928.6) 7807.44,5025.79 U5.33@8002.68,5025.79
  Layer 4 w10: v2@6770.26,4955 6770.26,4955.26 6788,4973 6972,4973 7016.4,4928.6 v2(7710.24,4928.6)
FDCAN_TX: U5.34 U6.1 | length 1174.6
  Layer 1 w10: U6.1@6935,4897.28 6935,4940 6949.16,4954.16 v2(6950,4954.16) ; v2(7745,4925) 7826.1,5006.1 U5.34@8002.68,5006.1
  Layer 4 w10: v2(6950,4954.16) 6950.84,4954.16 6995,4910 7702.19,4910 7702.44,4909.76 7729.76,4909.76 v2(7745,4925)
GND: C1.1 C2.2 C3.1 C4.1 C5.1 C6.1 C7.1 C8.1 C9_M0.2 C9_M1.2 C9_M2.2 C10_M0.1 C10_M1.1 C10_M2.1 C11_M0.1 C11_M1.1 C11_M2.1 C12_M0.1 C12_M1.1 C12_M2.1 C13_M0.1 C13_M1.1 C13_M2.1 C14_M0.1 C14_M1.1 C14_M2.1 C15_M0.1 C15_M1.1 C15_M2.1 C16_M0.2 C16_M1.2 C16_M2.2 C17_M0.1 C17_M1.1 C17_M2.1 C18_M0.1 C18_M1.1 C18_M2.1 C19_M0.1 C19_M1.1 C19_M2.1 C20_M0.1 C20_M1.1 C20_M2.1 C21_M0.1 C21_M1.1 C21_M2.1 C22_M0.1 C22_M1.1 C22_M2.1 C24_M0.2 C24_M1.2 C24_M2.2 C25_M0.2 C25_M1.2 C25_M2.2 C26_M0.1 C26_M1.1 C26_M2.1 C27_M0.2 C27_M1.2 C27_M2.2 C28_M0.2 C28_M1.2 C28_M2.2 C29_M0.2 C29_M1.2 C29_M2.2 C31.2 C32.2 C33.1 C34.1 C36.2 C37.2 C38.2 C39.2 C40.2 C41.2 C42.1 C43.1 C44.2 C45.2 C46.2 C47.2 C48.1 C49.1 C50.1 C51.1 C52.1 C53.1 C54.1 C55.1 C56_M0.1 C56_M1.1 C56_M2.1 C57_M0.1 C57_M1.1 C57_M2.1 C58_M0.1 C58_M1.1 C58_M2.1 C59_M0.1 C59_M1.1 C59_M2.1 C64_M0.2 C64_M1.2 C64_M2.2 C65_M0.2 C65_M1.2 C65_M2.2 D1.2 D3_M0.1 D3_M0.2 D3_M1.1 D3_M1.2 D3_M2.1 D3_M2.2 D10_M0.1 D10_M1.1 D10_M2.1 D13_M0.1 D13_M1.1 D13_M2.1 D15_M0.1 D15_M1.1 D15_M2.1 D16_M0.1 D16_M1.1 D16_M2.1 D18_M0.2 D18_M1.2 D18_M2.2 D19_M0.2 D19_M1.2 D19_M2.2 GND.1 I1_M0.9 I1_M0.11 I1_M1.9 I1_M1.11 I1_M2.9 I1_M2.11 I2_M0.9 I2_M0.11 I2_M1.9 I2_M1.11 I2_M2.9 I2_M2.11 I3_M0.2 I3_M0.4 I3_M1.2 I3_M1.4 I3_M2.2 I3_M2.4 I4_M0.2 I4_M0.4 I4_M1.2 I4_M1.4 I4_M2.2 I4_M2.4 J2.P$2 J3.P$2 J4.P$2 J5.P$3 J5.P$4 J5.P$6 J6.P$2 J6.P$4 J7.3 J8.P$2 J8.P$4 J9.P$3 J9.P$4 J9.P$6 J10.P$2 J10.P$4 J11.P$2 J11.P$4 J12.P$2 J12.P$4 J13.P$3 J13.P$4 J13.P$6 Q1.3 Q2_M0.2 Q2_M1.2 Q2_M2.2 Q3.2 Q4.2 Q7_M0.2 Q7_M1.2 Q7_M2.2 Q8_M0.2 Q8_M1.2 Q8_M2.2 R2.2 R6_M0.2 R6_M1.2 R6_M2.2 R9_M0.2 R9_M1.2 R9_M2.2 R10_M0.2 R10_M1.2 R10_M2.2 R13.2 R20.2 U1_M0.8 U1_M0.11 U1_M1.8 U1_M1.11 U1_M2.8 U1_M2.11 U2.1 U2.9 U3.2 U4.2 U5.19 U5.23 U5.35 U5.47 U6.2 | length 21046.4
  Layer 1 w10: C48.1@7910,4972.8 7937.8,4972.8 7951.42,4986.42 U5.35@8002.68,4986.42 ; C50.1@8067.8,5325 8067.8,5307.2 8081.42,5293.58 U5.23@8081.42,5242.32 ; U5.19@8160.16,5242.32 8160.16,5273.66 8219.53,5333.03 C52.1@8219.53,5335 ; 1430,4145 ccw(c1580,4145) 1580,3995 9030,3995 ccw(c9030,4145) 9180,4145 9180,6595 ccw(c9030,6595) 9030,6745 1580,6745 ccw(c1580,6595) 1430,6595 1430,4145